# Altium PCB TH_Board.PcbDoc
Units mm, origin at the board's own origin, x right, y up, seen from the top; angles counter-clockwise.
Board outline 20 x 19 mm, 4 copper layers (Top Layer, Int1 (GND), Int2 (PWR), Bottom Layer), stack 1.334 mm thick; 32 components, 17 nets, 106 pads, 59 vias.
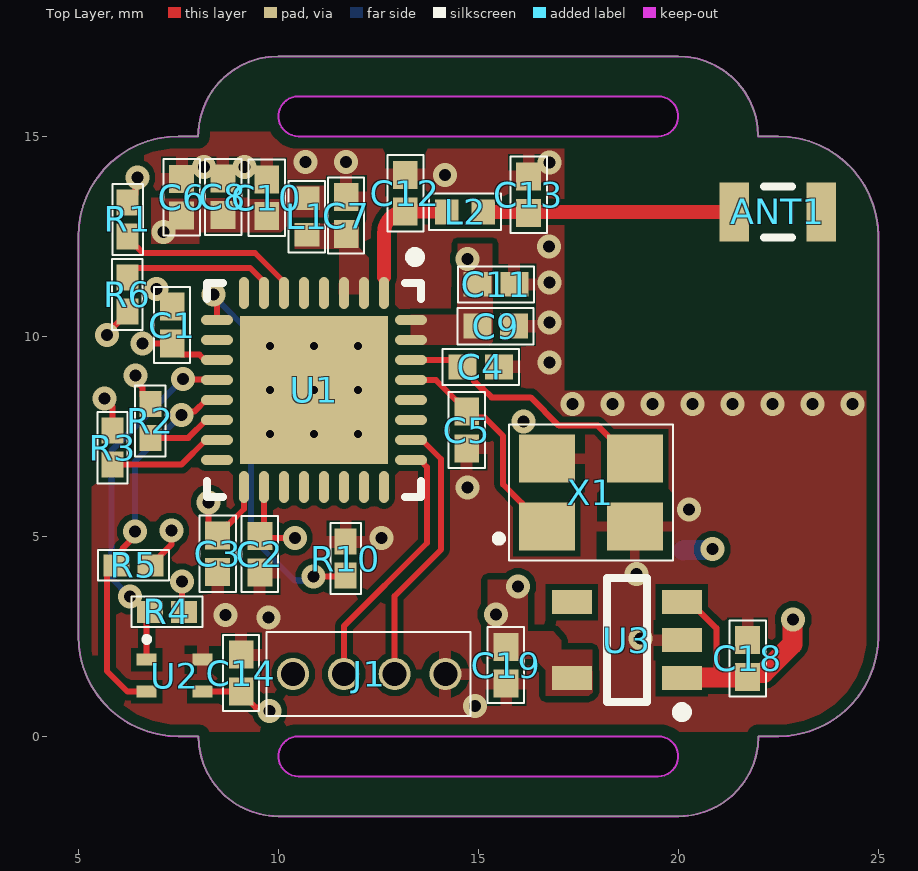
[diagram p0: Top Layer view]
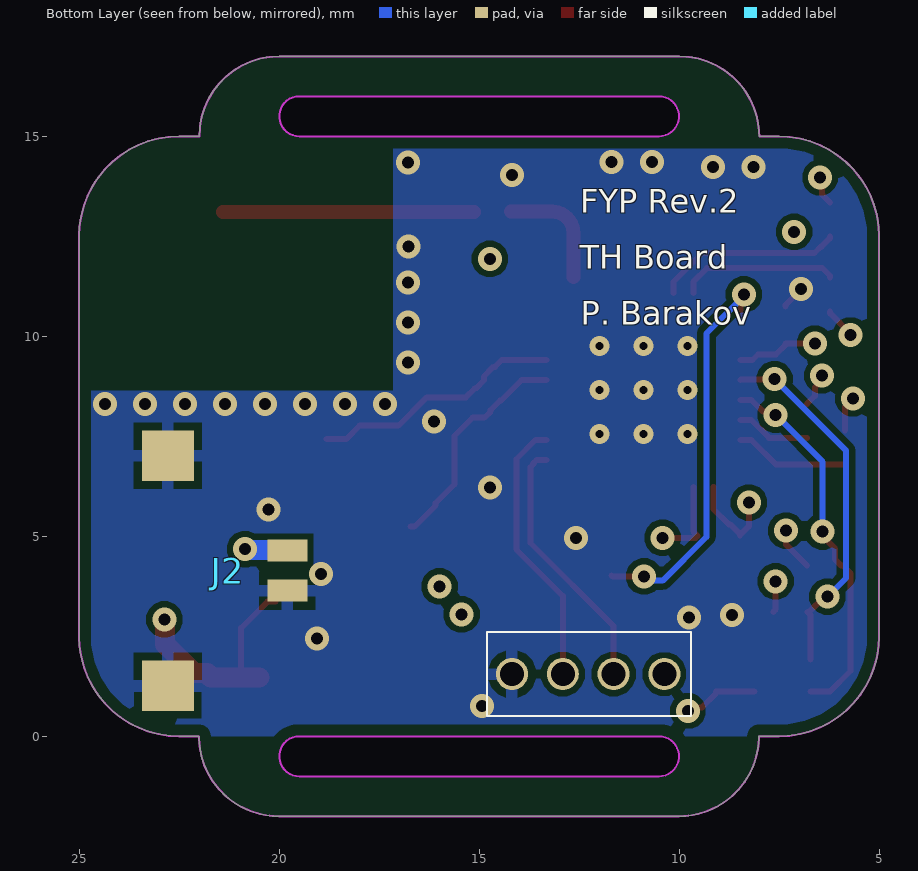
[diagram p1: Bottom Layer view, seen from below]
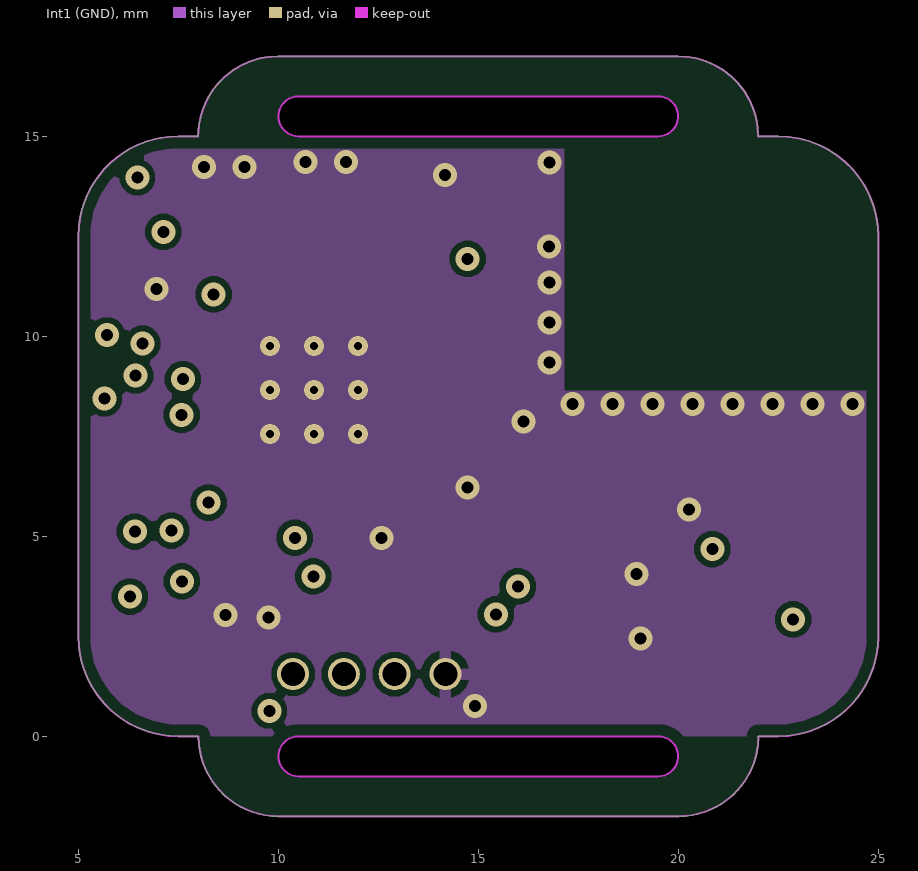
[diagram p2: Int1 (GND)]
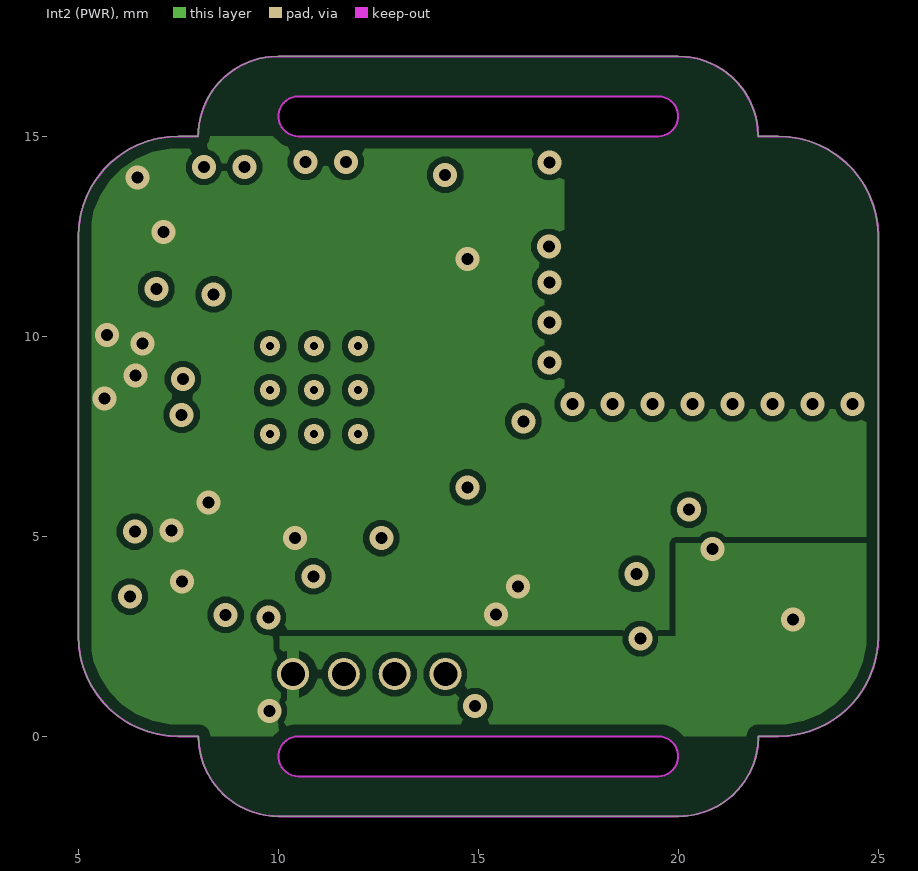
[diagram p3: Int2 (PWR)]
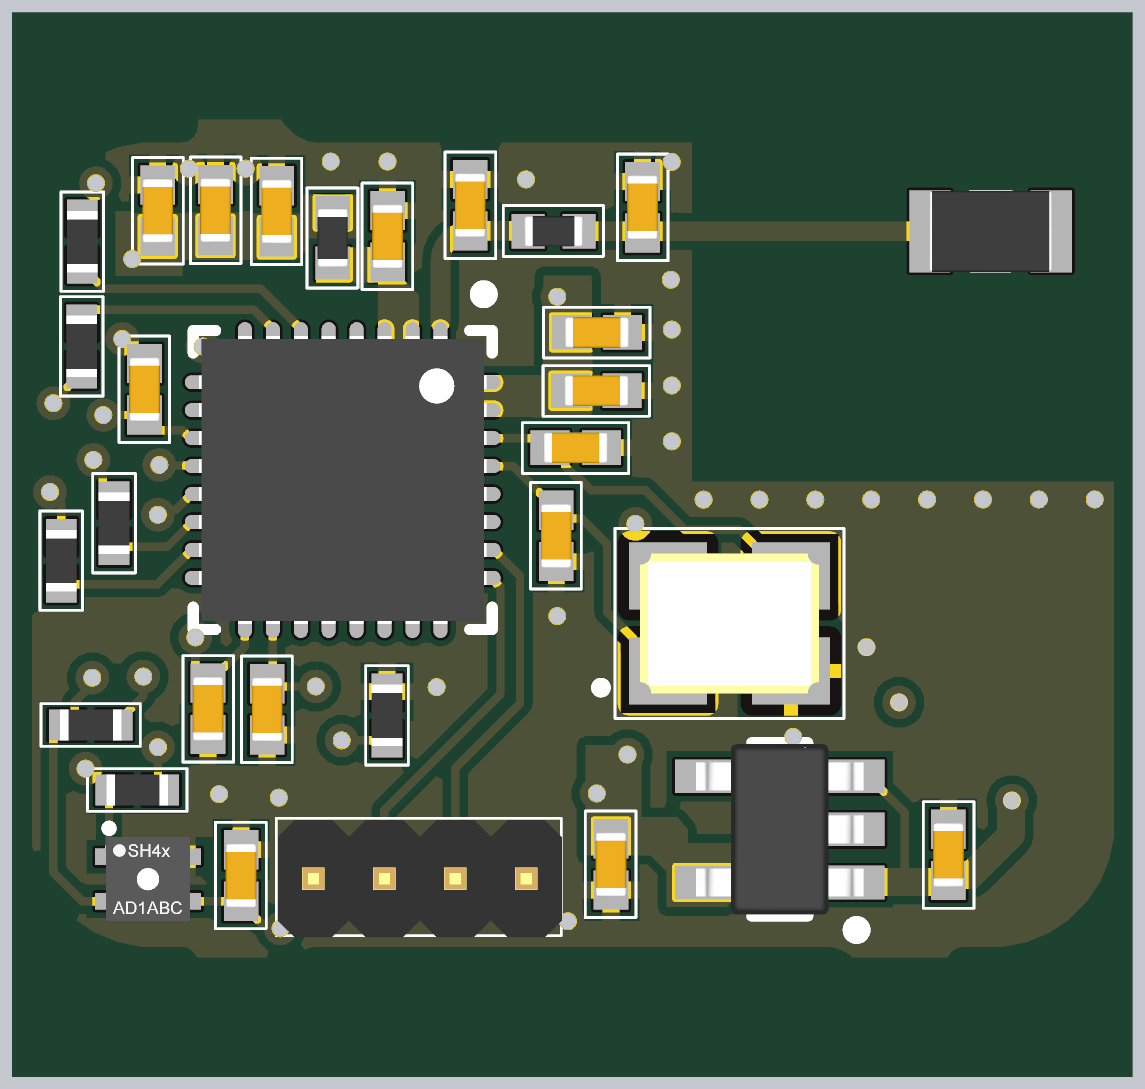
[diagram p4: 3D render of the assembled board from above, using the file's embedded part models]

## Layer stack, top to bottom
Top Solder: solder mask 0.0254, SM-001, Dk 4
Top Layer: signal copper 0.035
Dielectric 1: prepreg 0.1295, PP-017, Dk 4.3
Dielectric 2: prepreg 0.1295, PP-017, Dk 4.3
Int1 (GND): signal copper 0.0175
Dielectric 3: core 0.7112, Core-039, Dk 4.8
Int2 (PWR): signal copper 0.0175
Dielectric 4: prepreg 0.1295, PP-017, Dk 4.3
Dielectric 5: prepreg 0.1295, PP-017, Dk 4.3
Bottom Layer: signal copper 0.035
Bottom Solder: solder mask 0.0254, SM-001, Dk 4

## Board outline
7.5,0 8.004,0 ccw(c10.004,0) 10.004,-2 20.004,-2 ccw(c20.004,0) 22.004,0 22.5,0 ccw(c22.5,2.5) 25,2.5 25,12.5 ccw(c22.5,12.5) 22.5,15 21.996,15 ccw(c19.996,15) 19.996,17 9.996,17 ccw(c9.996,15) 7.996,15 7.5,15 ccw(c7.5,12.5) 5,12.5 5,2.5 ccw(c7.5,2.5)
cut-out: 10.504,15 19.496,15 ccw(c19.496,15.5) 19.496,16 10.504,16 ccw(c10.504,15.5)
cut-out: 10.504,-1 cw(c10.504,-0.5) 10.504,0 19.496,0 cw(c19.496,-0.5) 19.496,-1

## Design rules (kind name [scope] priority, off if disabled: settings)
BoardOutlineClearance BoardOutlineClearance_1 [All] p1: gap=0.3 ignorepadtopadclearanceinfootprint=FALSE
Clearance "Stitching GND" [IsStitchingVia and InNet('GND') vs (IsVia and (Not IsStitchingVia)) Or IsPad] p1: gap=0.1 ignorepadtopadclearanceinfootprint=FALSE
Clearance Clearance_1 [(ExistsOnLayer('Int1 (GND)') Or ExistsOnLayer('Int2 (PWR)')) vs (ExistsOnLayer('Int1 (GND)') Or ExistsOnLayer('Int2 (PWR)'))] p2: gap=0.15 ignorepadtopadclearanceinfootprint=FALSE except(0.2: Arc-Arc Arc-Track Arc-Text Track-Track Track-Text Text-Text; 0.254: Hole-Hole) sourcerule=46 cellrowname=All cellrowtype=0 cellcolname=All cellcoltype=0 innerlayers=TRUE
Clearance Clearance_2 [(ExistsOnLayer('Top Layer') Or ExistsOnLayer('Bottom Layer')) vs (ExistsOnLayer('Top Layer') Or ExistsOnLayer('Bottom Layer'))] p3: gap=0.15 ignorepadtopadclearanceinfootprint=FALSE except(0.2: Arc-Arc Arc-Track Arc-Text Track-Track Track-Text Text-Text; 0.254: Hole-Hole) sourcerule=46 cellrowname=All cellrowtype=0 cellcolname=All cellcoltype=0 outerlayers=TRUE
Clearance [All] p4: gap=0.254 ignorepadtopadclearanceinfootprint=FALSE ismatrix=TRUE
HoleSize None [HasFootprint('QFN*') OR HasFootprint('XCL2*')] p1: absolutevalues=TRUE maxlimit=2.54 minlimit=0 maxpercent=80.000 minpercent=20.000
HoleSize [All] p2: absolutevalues=TRUE maxlimit=6.3 minlimit=0.3 maxpercent=80.000 minpercent=20.000
HoleToHoleClearance [All] p1: gap=0.5 allowstackedmicrovias=TRUE
MinimumSolderMaskSliver MinimumSolderMaskSliver_1 [All] p1: minsoldermaskwidth=0
MinimumSolderMaskSliver [All] p2: minsoldermaskwidth=0.1
PlaneConnect [All] p1: planeconnectstyle=Relief reliefexpansion=0.508 reliefentries=2 reliefconductorwidth=0.254 reliefairgap=0.254
PolygonConnect GND_Via_Connect [IsVia] p1: thpad.connectstyle=Relief thpad.reliefconductorwidth=0.3 thpad.reliefentries=2 thpad.polygonreliefangle="0 Angle" thpad.airgapwidth=0.2 smdpad.connectstyle=Relief smdpad.reliefconductorwidth=0.3 smdpad.reliefentries=2 smdpad.polygonreliefangle="0 Angle" smdpad.airgapwidth=0.2 via.connectstyle=Direct via.reliefconductorwidth=0.254 via.reliefentries=2 via.polygonreliefangle="0 Angle" via.airgapwidth=0.254
PolygonConnect "Direct Connect" [IsNamedPolygon('3.3VPOUR1') OR IsNamedPolygon('3.3V_PINS2_3') OR IsNamedPolygon('3.3V_POUR2') OR IsNamedPolygon('3.3V_POUR3') OR IsNamedPolygon('3.3V_POUR4') OR IsNamedPolygon('FB_POUR') OR IsNamedPolygon('1.8V_BUCK_POUR') OR IsNamedPolygon('1.8V_BOTTOM')] p2: connectstyle=Direct reliefconductorwidth=0.3 reliefentries=4 polygonreliefangle="45 Angle" airgapwidth=0.2
PolygonConnect [All] p3: connectstyle=Relief reliefconductorwidth=0.3 reliefentries=4 polygonreliefangle="90 Angle" airgapwidth=0.2
RoutingVias [All] p1: holewidth=0.3 width=0.6 viastyle="Through Hole" minholewidth=0.3 minwidth=0.6 maxholewidth=0.3 maxwidth=0.6
SilkToSilkClearance [All] p1: silktosilkclearance=0.1
SilkToSolderMaskClearance [IsPad] p1: minsilkscreentomaskgap=0.08 clearancetoexposedcopper=TRUE
SolderMaskExpansion ViaMasl [IsVia] p1: expansion=0.102 istentingtop=TRUE useseparateexpansions=TRUE expansionbottom=0.102 istentingbottom=TRUE
SolderMaskExpansion [All] p2: expansion=0.05 istentingtop=FALSE
SupplyNets "Schematic Supply Nets_3" [InNet('+VBAT')] p1: voltage=0.000
SupplyNets "Schematic Supply Nets_2" [InNet('GND')] p2: voltage=0.000
SupplyNets "Schematic Supply Nets" [InNet('+3.3V')] p3: voltage=0.000
UnRoutedNet [All] p1: checkbadconnections=TRUE
Width MaxMinWidth_1 [All] p1: maxlimit=0.7 minlimit=0.1 preferedwidth=0.15 minimp=50.000000 maximp=50.000000 favimp=50.000000
23 further rules are at their usual default settings.

## Components (designator, comment, footprint, x,y, rotation, side; value= is the part's Value field where it differs from the comment)
ANT1 "2.4GHZ_ANT_50_OHM" Chip2PinSM127P600-8N 22.488,13.109 r0 top
C1 "C_0402_0.1uF" C_0402 7.346,10.281 r90 top
C2 "C_0402_0.1uF" C_0402 9.54,4.554 r90 top
C3 "C_0402_0.1uF" C_0402 8.482,4.564 r270 top
C4 "C_0402_10pF" C_0402 15.061,9.236 r180 top
C5 "C_0402_10pF" C_0402 14.712,7.658 r90 top
C6 "C_0402_10uF" C_0402 7.581,13.477 r270 top
C7 "C_0402_0.1uF" C_0402 11.696,13.019 r90 top
C8 "C_0402_1uF" C_0402 8.615,13.487 r270 top
C9 "C_0402_10nF" C_0402 15.434,10.256 r180 top
C10 "C_0402_0.1uF" C_0402 9.712,13.464 r90 top
C11 "C_0402_0.1uF" C_0402 15.442,11.3 r180 top
C12 "C_0402_3.3pF" C_0402 13.173,13.577 r270 top
C13 "C_0402_3.3pF" C_0402 16.256,13.54 r270 top
C14 "C_0402_0.1uF" C_0402 9.074,1.581 r90 top
C18 "C_0402_1uF" C_0402 21.731,1.949 r270 top
C19 "C_0402_1uF" C_0402 15.692,1.779 r90 top
J1 "4PIN_HEADER_1.27" 4PIN_HEADER_1.27-Footprint-1 14.177,1.558 r180 top
J2 "503763-0291" "Molex 503763-0291" 20.443,4.64 r90 bottom
L1 "L_0402_2.2nH" L_0402 10.714,12.993 r270 top
L2 "L_0402_2.2nH" L_0402 14.667,13.109 r180 top
R1 "R_0402_4k7" R_0402 6.232,12.925 r270 top
R2 "R_0402_4k7" R_0402 6.801,7.886 r270 top
R3 "R_0402_4k7" R_0402 5.854,7.215 r270 top
R4 "R_0402_4k7" R_0402 7.216,3.111 r180 top
R5 "R_0402_4k7" R_0402 6.382,4.274 r180 top
R6 "R_0402_4k7" R_0402 6.223,11.049 r90 top
R10 "R_0402_4k7" R_0402 11.684,4.445 r90 top
U1 "ESP32-C3" QFN127P600-8N 10.892,8.658 r270 top
U2 "SHT40_B" SHT40_B-Footprint-1 6.71,1.918 r0 top
U3 "TLV75533PDBVR" SOT95P280X145-5N 18.714,2.406 r180 top
X1 "40MHz_OSC" 40MHz_OSC-Footprint-1 16.713,6.942 r0 top

## Footprints (in the part's own frame and the unit in brackets; to place one, negate y for a bottom-side part, rotate by r counter-clockwise, add the part's x,y. Pads: shape width x height; smd on the part's side, far side on the other; paste and mask are expansions set on the pad)
4PIN_HEADER_1.27-Footprint-1 [mm]
  round 0.8 hole 0.6: 1(0,0) 2(1.27,0) 3(2.54,0) 4(3.81,0)
  silkscreen extent -0.63,-1.05 4.47,1.05, body extent -0.64,-1.02 4.44,1.08, height 4
40MHz_OSC-Footprint-1 [mm]
  rect 1.4x1.2 smd mask+0.2: 1(0,-1.7) 2(2.2,-1.7) 3(2.2,0) 4(0,0)
  silkscreen extent -1.25,-2.55 3.15,0.85, body extent -0.5,-2.1 2.7,0.4, height 0.6
C_0402 [mm]
  rect 0.7x0.62 smd: 1(-0.46,0) 2(0.46,0)
  silkscreen extent -0.95,-0.45 0.95,0.46, body extent -0.58,-0.28 0.58,0.28, height 0.55
Chip2PinSM127P600-8N [mm]
  rect 0.74x1.47 smd: 1(-1.085,0) 2(1.085,0)
  silkscreen extent -0.35,-0.64 0.35,0.64, body extent -1.1,-0.72 1.1,0.72, height 1.2
L_0402 [mm]
  rect 0.59x0.62 smd: 1(-0.455,0) 2(0.455,0)
  silkscreen extent -0.89,-0.46 0.9,0.45, body extent -0.53,-0.28 0.53,0.28, height 0.55
"Molex 503763-0291" [mm] "Picolock 1.0mm pitch 2-pin"
  rect 0.55x1 smd: 1(0,-0.65) 2(-1,-0.65)
  rect 1.26x1.3 smd: 3(2.375,2.34) 4(-3.375,2.34)
  body extent -3.88,-1.03 2.72,4.16, height 1.47
QFN127P600-8N [mm]
  oval 0.8x0.25 smd: 1(-2.425,1.75) 2(-2.425,1.25) 3(-2.425,0.75) 4(-2.425,0.25) 5(-2.425,-0.25) 6(-2.425,-0.75) 7(-2.425,-1.25) 8(-2.425,-1.75) 17(2.425,-1.75) 18(2.425,-1.25) 19(2.425,-0.75) 20(2.425,-0.25) 21(2.425,0.25) 22(2.425,0.75) 23(2.425,1.25) 24(2.425,1.75)
  oval 0.25x0.8 smd: 9(-1.75,-2.425) 10(-1.25,-2.425) 11(-0.75,-2.425) 12(-0.25,-2.425) 13(0.25,-2.425) 14(0.75,-2.425) 15(1.25,-2.425) 16(1.75,-2.425) 25(1.75,2.425) 26(1.25,2.425) 27(0.75,2.425) 28(0.25,2.425) 29(-0.25,2.425) 30(-0.75,2.425) 31(-1.25,2.425) 32(-1.75,2.425)
  rect 3.7x3.7 smd: 33(0,0)
  silkscreen extent -3.45,-2.68 2.68,2.67, body extent -2.58,-2.58 2.58,2.58, height 0.9
R_0402 [mm]
  rect 0.65x0.55 smd: 1(-0.425,0) 2(0.425,0)
  silkscreen extent -0.89,-0.38 0.89,0.38, body extent -0.55,-0.28 0.55,0.28, height 0.4
SHT40_B-Footprint-1 [mm]
  rect 0.5x0.3 smd: 1(0,0) 2(0,-0.799) 3(1.4,-0.8) 4(1.4,0)
  silkscreen extent -0.01,0.5 0.01,0.52, body extent -0.05,-1.15 1.45,0.35, height 0.69
SOT95P280X145-5N [mm] "SOT23, 5-Leads, Body 2.90x2.80mm, Pitch 0.95mm, IPC Medium Density"
  rect 1x0.6 smd: 1(-1.375,0.95) 2(-1.375,0) 3(-1.375,-0.95) 4(1.375,-0.95) 5(1.375,0.95)
  silkscreen extent -1.5,-1.55 0.5,1.92, body extent -1.5,-1.53 1.5,1.53, height 1.45

## Part data
ANT1: library part CMP-00009-6, "2.4GHz Chip Antenna 50 Ohm Impedance ANT2012LL00R2400A", Distributor=Mouser, Order Code=603-ANT2012LL00R2400
C1 C2 C3 C7 C10 C11 C14: library part CMP-00055-1, JLC Part Number=C1525
C4 C5: library part CMP-00051-1, JLC Part Number=C32949
C6: library part CMP-00052-1, JLC Part Number=C15525
C8 C18 C19: library part CMP-00053-1, JLC Part Number=C52923
C9: library part CMP-00054-1, JLC Part Number=C15195
C12 C13: library part CMP-00056-1, JLC Part Number=C326841
J1: library part CMP-00049-2, Distributor=Mouser, Order Code=855-M50-3530442
J2: library part CMP-007-000000-2, "Molex 503763-0291", Design Item ID=503763-0291, Distributor=Mouser, Order Code=538-503763-0291
L1 L2: library part CMP-00057-1, JLC Part Number=C92035
R1 R2 R3 R4 R5 R6 R10: library part CMP-00050-1, JLC Part Number=C25900
U1: library part CMP-00008-4, "33 pin ESP32_C3 Microcontroller", JLC Part Number=C2858491
U2: library part CMP-00001-4, "Board Mount Humidity Sensors +/-1.8%RH/+/-0.2C, 4th generation, digital (I2C) humidity and temperature sensor with 0x45 I2C address.", JLC Part Number=C3664342
U3: library part CMP-00019-2, "LDO Voltage Regulators 500-mA high-PSRR low-IQ low-dropout voltage regulator with enable 5-SOT-23 -40 to 125", JLC Part Number=C404027
X1: library part CMP-00029-2, "40 MHZ Oscillator, 10pF load capacitance", JLC Part Number=C426988

## Via types
v1: diameter 0.6, hole 0.3, Top Layer to Bottom Layer, tented both sides, 50 vias
v2: diameter 0.5, hole 0.2, Top Layer to Bottom Layer, tented both sides, 9 vias

## Nets (pads, with @x,y where several pads share a name; then routed paths per layer and width w, separated by ;. In a path a pad name is that pad's centre, name@x,y a point inside that pad or via, vN(x,y) a via of type N, cw(c..) or ccw(c..) an arc to the next point about the centre after c; other vN are vias at no path point)
+3.3V: C1.1 C2.2 C3.1 C6.2 C8.2 C9.2 C10.1 C11.2 C14.1 C19.2 L1.1 R1.1 R2.1 R3.1 R4.1 R5.1 R6.1 U1.11 U1.17 U1.18 U1.31 U1.32 U2.3 U3.5 | length 13.6
  Top Layer w0.15: v1(5.654,8.443) 5.854,8.242 R3.1 ; v1(5.715,10.033) 5.715,10.066 6.223,10.574 R6.1 ; R1.1 6.432,13.55 6.432,13.925 v1(6.477,13.97) ; v1(6.43,9.018) 6.43,8.896 6.601,8.725 6.601,8.511 R2.1 ; v1(6.608,9.821) C1.1 ; R5.1 7.324,4.791 v1(7.324,5.141) ; C1.1@7.346,9.781 7.581,9.546 8.027,9.546 8.165,9.408 U1.11 ; v1(7.587,3.876) 7.587,3.165 R4.1 ; U2.3 9.071,1.118 C14.1 9.074,1.081 9.433,0.721 9.693,0.721 v1(9.779,0.635) ; v1(8.255,5.842) 8.255,5.251 C3.1 8.482,5.064 8.717,5.299 8.757,5.299 9.142,5.684 U1.17 ; U1.18 9.642,5.116 C2.2 9.589,4.964 v1(10.411,4.964)
  other v1: 15.438,3.049 15.989,3.746 14.732,11.938 7.125,12.613
+VBAT: C18.2 J1.4 J2.1 U3.1 U3.3 | length 6.5
  Top Layer w0.15: U3.3@20.089,3.366 20.289,3.366 20.952,2.703 20.952,1.468
  Top Layer w0.5: U3.1@20.487,1.468 20.952,1.468 21.709,1.468 21.749,1.507 21.749,1.547 21.791,1.589 22.137,1.589 22.848,2.301 22.848,2.904 v1(22.868,2.923)
  Bottom Layer w0.5: J2.1@20.121,4.64 20.141,4.66 20.829,4.66 v1(20.848,4.679)
ANT: ANT1.1 C13.2 L2.1 | length 6.5
  Top Layer w0.35: L2.1 ANT1.1 ; C13.2@16.266,13.109 C13.2@16.485,13.109
ESP_BOOT: R3.2 U1.15 | length 2.9
  Top Layer w0.15: R3.2 7.574,6.79 8.192,7.408 U1.15
ESP_EN: R6.2 U1.7 | length 4
  Top Layer w0.15: R6.2 6.223,11.508 6.423,11.708 9.297,11.708 9.642,11.363 U1.7
GND: C1.2 C2.1 C3.2 C4.1 C5.1 C6.1 C7.2 C8.1 C9.1 C10.2 C11.1 C12.1 C13.1 C14.2 C18.1 C19.1 J1.1 J2.2 J2.3 J2.4 R10.2 U1.33 U2.4 U3.2 X1.2 X1.4 | length 0.6
  Top Layer w0.15: v1(6.948,11.183) 6.948,11.179 7.346,10.781 C1.2
  other v1: 14.923,0.762 19.049,2.444 9.749,2.974 8.679,3.036 18.955,4.061 12.573,4.953 20.265,5.666 14.732,6.223 16.129,7.874 17.35,8.307 18.35,8.308 19.35,8.308 20.35,8.309 21.35,8.309 22.35,8.31 23.35,8.31 24.35,8.31 16.782,9.351 16.782,10.351 16.781,11.351 16.764,12.243 14.173,14.038 8.138,14.23 9.154,14.23 10.678,14.357 11.694,14.357 16.78,14.351
  other v2: 9.792,7.558 10.892,7.558 11.992,7.558 9.792,8.658 10.892,8.658 11.992,8.658 9.792,9.758 10.892,9.758 11.992,9.758
I2C_SCL: R5.2 U1.13 U2.2 | length 9.4
  Top Layer w0.15: v1(6.411,5.121) 6.411,4.999 6.098,4.686 6.098,4.415 R5.2 5.915,4.274 5.715,4.074 5.715,1.633 6.229,1.118 U2.2 ; v1(7.584,8.037) 7.67,8.123 7.907,8.123 8.192,8.408 U1.13
  Bottom Layer w0.15: v1(6.411,5.121) 6.411,6.864 v1(7.584,8.037)
I2C_SDA: R4.2 U1.12 U2.1 | length 9.1
  Top Layer w0.15: v1(6.29,3.494) 6.358,3.494 6.741,3.111 R4.2 6.71,3.03 U2.1 ; v1(7.612,8.928) 7.622,8.918 8.457,8.918 U1.12
  Bottom Layer w0.15: v1(6.29,3.494) 5.825,3.959 5.825,7.141 v1(7.612,8.928)
LED1: R10.1 U1.9 | length 9.9
  Top Layer w0.15: v1(8.382,11.049) 8.467,10.964 U1.9 ; v1(10.874,3.999) 11.663,3.999 R10.1
  Bottom Layer w0.15: v1@8.463,10.925 9.317,10.071 9.317,4.984 10.411,3.89 10.643,3.89 10.666,3.913 10.917,3.913 v1@10.941,3.89
MCU_ANT: C12.2 L2.2 U1.1 | length 3
  Top Layer w0.35: U1.1@12.642,11.479 12.642,12.586 cw(c13.173,12.586) C12.2 L2.2@14.204,13.117
NetC4_2: C4.2 U1.30 X1.3 | length 6.4
  Top Layer w0.15: U1.30 14.429,9.408 C4.2 14.641,9.236 14.876,9.001 14.876,8.902 15.086,8.693 15.115,8.693 15.333,8.475 16.307,8.475 17.015,7.767 17.988,7.767 18.326,7.43 X1.3@18.812,7.43
NetC5_2: C5.2 U1.29 X1.1 | length 5.7
  Top Layer w0.15: U1.29 13.938,8.908 14.453,8.393 14.477,8.393 14.712,8.158 C5.2 14.859,7.97 15.159,7.97 15.621,7.508 15.621,6.297 16.088,5.83 16.088,5.767 16.613,5.242 X1.1
NetC7_1: C7.1 L1.2 U1.2 U1.3
NetR1_2: R1.2 U1.6 | length 4.7
  Top Layer w0.15: R1.2 6.232,12.45 6.432,12.25 6.446,12.25 6.614,12.082 9.418,12.082 10.142,11.358 U1.6
NetR2_2: R2.2 U1.14 | length 1.9
  Top Layer w0.15: R2.2 7.75,7.461 8.197,7.908 U1.14
USB_N: J1.3 U1.25 | length 6.5
  Top Layer w0.15: J1.3 11.637,2.754 13.716,4.832 13.716,6.731 13.642,6.805 13.642,6.831 13.565,6.908 U1.25
USB_P: J1.2 U1.26 | length 6.8
  Top Layer w0.15: J1.2 12.907,3.509 14.066,4.667 14.066,6.934 13.592,7.408 U1.26
pads on no net: ANT1.2 U1.4 U1.5 U1.8 U1.10 U1.16 U1.19 U1.20 U1.21 U1.22 U1.23 U1.24 U1.27 U1.28 U3.4

## Polygon pours and split planes (outlines as drawn)
GND on Int1 (GND) "NONET_L01_P-001" (solid, pour order 1): 5,0 25,0 25,15 5,15
GND on Bottom Layer "NONET_L01_P-001" (solid, pour order 16): 0,0 25,0 25,15 0,15
+3.3V on Top Layer "3.3V_POUR4" (solid, pour order 9): 17.856,1.016 16.689,1.016 16.689,1.658 16.406,1.94 15.241,1.94 15.241,3.913 16.237,3.913 16.237,2.632 16.877,2.632 17.07,2.407 17.07,2.16 17.845,2.16
+3.3V on Top Layer "3.3V_POUR3" (solid, pour order 12): 13.311,10.539 13.311,9.784 15.367,9.779 15.348,12.319 14.486,12.319 14.475,10.539
+3.3V on Top Layer "3.3V_POUR2" (solid, pour order 13): 6.827,13.468 6.827,12.241 8.026,12.23 8.026,12.599 10.063,12.599 10.424,12.96 11.186,12.96 11.186,13.74 11.156,13.769 10.043,13.769 10.043,13.468 9.916,13.468 7.249,13.468
NetC7_1 on Top Layer "3.3V_PINS2_3" (solid, pour order 14): 11.516,11.049 12.261,11.049 12.261,11.97 12.007,12.224 12.007,12.832 10.414,12.832 10.414,12.192 11.525,12.192 11.525,11.609
GND on Top Layer "" (solid, pour order 15): 5.334,0.11 25.005,0.11 25.005,15.11 5.334,15.11
+VBAT on Int2 (PWR) "NONET_L01_P-001" (solid, pour order 5): 25,0 25.019,0.019 25.019,4.826 19.939,4.826 19.939,2.5 10.033,2.5 10.033,0
+3.3V on Int2 (PWR) "NONET_L01_P-001" (solid, pour order 10): 5.334,0 25,0 25,15 5.334,15

## Keep-outs
Keep-Out Layer:
  lines w0.05: 5,2.5 ccw(c7.5,2.5) 7.5,0 8.004,0 ccw(c10.004,0) 10.004,-2 20.004,-2 ccw(c20.004,0) 22.004,0 22.5,0 ccw(c22.5,2.5) 25,2.5 25,12.5 ccw(c22.5,12.5) 22.5,15 21.996,15 ccw(c19.996,15) 19.996,17 9.996,17 ccw(c9.996,15) 7.996,15 7.5,15 ccw(c7.5,12.5) 5,12.5 5,2.5 ; 10.504,-1 cw(c10.504,-0.5) 10.504,0 19.496,0 cw(c19.496,-0.5) 19.496,-1 10.504,-1 ; 10.504,15 cw(c10.504,15.5) 10.504,16 19.496,16 cw(c19.496,15.5) 19.496,15 10.504,15

## Other copper
Top Layer:
  pour cut-out: 17.145,8.636 17.145,14.986 25.019,14.986 25.019,8.636
Int1 (GND):
  pour cut-out: 17.145,8.636 17.145,14.986 25.019,14.986 25.019,8.636
Int2 (PWR):
  pour cut-out: 17.145,8.636 17.145,14.986 25.019,14.986 25.019,8.636
Bottom Layer:
  pour cut-out: 17.145,8.636 17.145,14.986 25.019,14.986 25.019,8.636

## Silkscreen, mask and mechanical layers (free items; w line width, h text height)
Bottom Overlay:
  text "FYP Rev.2" at 12.475,12.889 h1
  text "TH Board" at 12.478,11.489 h1
  text "P. Barakov" at 12.455,10.089 h1
Mechanical 1:
  lines w0.05: 5,2.5 ccw(c7.5,2.5) 7.5,0 8.004,0 ccw(c10.004,0) 10.004,-2 20.004,-2 ccw(c20.004,0) 22.004,0 22.5,0 ccw(c22.5,2.5) 25,2.5 25,12.5 ccw(c22.5,12.5) 22.5,15 21.996,15 ccw(c19.996,15) 19.996,17 9.996,17 ccw(c9.996,15) 7.996,15 7.5,15 ccw(c7.5,12.5) 5,12.5 5,2.5 ; 10.504,-1 cw(c10.504,-0.5) 10.504,0 19.496,0 cw(c19.496,-0.5) 19.496,-1 10.504,-1 ; 10.504,15 cw(c10.504,15.5) 10.504,16 19.496,16 cw(c19.496,15.5) 19.496,15 10.504,15

## Dimensions
22.5,15 to 22.5,0 on Mechanical 1
5,2.5 to 25,2.5 on Mechanical 1